# EAGLE board CT_schematic (EAGLE 7.6.0)

Size 100 x 80 mm. Coordinates in mm from the lower left corner, seen from the top.
Outline: 0,0 100,0 100,80 0,80 0,0
Copper layers (1*16): Top 0.035mm / dielectric 1.5mm / Bottom 0.035mm
Design rules "default": minimum track width 10mil, minimum drill 24mil, track to track 8mil, track to pad 8mil, pad to pad 8mil, via to via 8mil, smd to smd 8mil, copper to edge 40mil, drill to drill 8mil, minimum pad ring 10mil, minimum via ring 8mil, stop-mask expansion 4mil, vias tented up to drill 0mil, thermal gap 10mil

## Footprints (pad centres in the part's own frame; a part is rotated, then mirrored left to right if it is on the bottom)
C0603 = smd 0.8 x 0.8: 1 -0.762,0; 2 0.762,0
C0402 = smd 0.5 x 0.5: 1 -0.508,0; 2 0.508,0
C0805 = smd 1.2 x 1.3: 1 -1.016,0; 2 1.016,0
C1210 = smd 1.2 x 2.5: 1 -1.524,0; 2 1.524,0
EXV-9H = smd 3.505 x 1.676: 1 -2.857,0; 2 2.857,0
L0603 = smd 0.8 x 0.8: 1 -0.762,0; 2 0.762,0
PJ-037B_PACKAGE = drill 3.7 square: 1 12,0 | drill 3.2 square: 2 6,0
R0603 = smd 0.8 x 0.8: 1 -0.762,0; 2 0.762,0
UFQFPN48 = smd 0.559 x 0.305: 1 -3.375,2.751; 2 -3.375,2.251; 3 -3.375,1.75; 4 -3.375,1.25; 5 -3.375,0.75; 6 -3.375,0.25; 7 -3.375,-0.25; 8 -3.375,-0.75; 9 -3.375,-1.25; 10 -3.375,-1.75; 11 -3.375,-2.251; 12 -3.375,-2.751; 25 3.375,-2.751; 26 3.375,-2.251; 27 3.375,-1.75; 28 3.375,-1.25; 29 3.375,-0.75; 30 3.375,-0.25; 31 3.375,0.25; 32 3.375,0.75; 33 3.375,1.25; 34 3.375,1.75; 35 3.375,2.251; 36 3.375,2.751 | smd 0.305 x 0.559: 13 -2.751,-3.375; 14 -2.251,-3.375; 15 -1.75,-3.375; 16 -1.25,-3.375; 17 -0.75,-3.375; 18 -0.25,-3.375; 19 0.25,-3.375; 20 0.75,-3.375; 21 1.25,-3.375; 22 1.75,-3.375; 23 2.251,-3.375; 24 2.751,-3.375; 37 2.751,3.375; 38 2.251,3.375; 39 1.75,3.375; 40 1.25,3.375; 41 0.75,3.375; 42 0.25,3.375; 43 -0.25,3.375; 44 -0.75,3.375; 45 -1.25,3.375; 46 -1.75,3.375; 47 -2.251,3.375; 48 -2.751,3.375 | smd 5.588 x 5.588: 49 0,0
SSOP-28 = smd 1.5 x 0.4: 1 -3.625,4.225; 2 -3.625,3.575; 3 -3.625,2.925; 4 -3.625,2.275; 5 -3.625,1.625; 6 -3.625,0.975; 7 -3.625,0.325; 8 -3.625,-0.325; 9 -3.625,-0.975; 10 -3.625,-1.625; 11 -3.625,-2.275; 12 -3.625,-2.925; 13 -3.625,-3.575; 14 -3.625,-4.225; 15 3.625,-4.225; 16 3.625,-3.575; 17 3.625,-2.925; 18 3.625,-2.275; 19 3.625,-1.625; 20 3.625,-0.975; 21 3.625,-0.325; 22 3.625,0.325; 23 3.625,0.975; 24 3.625,1.625; 25 3.625,2.275; 26 3.625,2.925; 27 3.625,3.575; 28 3.625,4.225
FCI_10118193-0001LF = smd 0.4 x 1.35: 1 -1.3,2.675; 2 -0.65,2.675; 3 0,2.675; 4 0.65,2.675; 5 1.3,2.675 | smd 1.6 x 1.4: 6 -3.2,2.45; 7 3.2,2.45 | smd 1.9 x 1.9: 8 -1.2,0; 9 1.2,0 | hole 0.5: -3.3,0; 3.3,0
SAMTEC_FTSH-105-01-L-DV-K = smd 0.762 x 2.794: 1 -2.54,-2.032; 2 -2.54,2.032; 3 -1.27,-2.032; 4 -1.27,2.032; 5 0,-2.032; 6 0,2.032; 7 1.27,-2.032; 8 1.27,2.032; 9 2.54,-2.032; 10 2.54,2.032
SOT143B = smd 1 x 0.7: 1 -0.75,-1 | smd 0.6 x 0.7: 2 0.95,-1; 3 0.95,1; 4 -0.95,1
ABS07-32.768KHZ-7-T = smd 1.1 x 2.4: 1 -2.5,0; 2 0,0
ABLS-25.000MHZ-B2F-T = smd 5.6 x 2.8: 1 -3.81,0; 2 5.69,0
ABLS-12.000MHZ-B4-T = smd 5.6 x 2.8: 1 0,0; 2 9.5,0
WSON-8 = smd 0.3 x 0.6: 1 -0.75,0; 2 0.05,0; 3 0.85,0; 4 1.65,0; 5 1.65,3.8; 6 0.85,3.8; 7 0.05,3.8; 8 -0.75,3.8 | smd 3 x 2.6: PAD 0.45,1.9
SON-6 = smd 0.55 x 0.3: 1 -0.355,0.5 | smd 0.52 x 0.3: 2 -0.37,0; 3 -0.37,-0.5; 4 0.37,-0.5; 5 0.37,0; 6 0.37,0.5
SW_4-1437565-2 = smd 1.4 x 2.1: 1 -2.23,4.55; 2 -2.23,-4.55; 3 2.23,4.55; 4 2.23,-4.55
LGM67K-G1J2-24-Z = smd 0.8 x 1.4: A -2,0; C 0,0
NC7SZ125M5X = smd 1.3 x 0.7: 1 -1.3,0.95; 2 -1.3,0; 3 -1.3,-0.95; 4 1.3,-0.95; 5 1.3,0.95

## Placement (x,y rotation side)
C1  1e-06  [C0603]  -31.75,62.23 0 top  (outside the outline)
C2  1e-07  [C0603]  -35.56,62.23 0 top  (outside the outline)
C3  1e-07  [C0603]  -39.37,62.23 0 top  (outside the outline)
C4  1e-07  [C0603]  -43.18,62.23 0 top  (outside the outline)
C5  1e-07  [C0603]  -46.99,62.23 0 top  (outside the outline)
C6  1e-07  [C0603]  -50.8,62.23 0 top  (outside the outline)
C7  4.7e-06  [C0603]  -24.13,62.23 0 top  (outside the outline)
C8  2.2e-06  [C0603]  -27.94,62.23 0 top  (outside the outline)
C9  1e-08  [C0603]  -54.61,62.23 0 top  (outside the outline)
C10  1e-06  [C0603]  -58.42,62.23 0 top  (outside the outline)
C11  1e-11  [C0402]  -45.72,67.31 0 top  (outside the outline)
C12  1e-11  [C0402]  -49.53,67.31 0 top  (outside the outline)
C13  1e-11  [C0402]  -53.34,67.31 0 top  (outside the outline)
C14  1e-11  [C0402]  -57.15,67.31 0 top  (outside the outline)
C15  1e-06  [C0603]  -62.23,62.23 0 top  (outside the outline)
C16  1e-07  [C0402]  -60.96,67.31 0 top  (outside the outline)
C17  4.7e-06  [C0805]  -15.24,57.15 0 top  (outside the outline)
C18  1e-07  [C0402]  -64.77,67.31 0 top  (outside the outline)
C19  1e-07  [C0402]  -68.58,67.31 0 top  (outside the outline)
C20  1e-07  [C0402]  -15.24,72.39 0 top  (outside the outline)
C21  1e-08  [C0402]  -19.05,72.39 0 top  (outside the outline)
C22  1e-05  [C1210]  -48.26,49.53 0 top  (outside the outline)
C23  1e-05  [C1210]  -54.61,49.53 0 top  (outside the outline)
C24  1e-07  [C0402]  -22.86,72.39 0 top  (outside the outline)
C25  0.0001  [EXV-9H]  -49.53,34.29 0 top  (outside the outline)
C26  0.0001  [EXV-9H]  -60.96,34.29 0 top  (outside the outline)
C27  1e-08  [C0402]  -26.67,72.39 0 top  (outside the outline)
C28  1e-08  [C0402]  -30.48,72.39 0 top  (outside the outline)
F1  240.0  [L0603]  -66.04,62.23 0 top  (outside the outline)
J1  PJ-037B  [PJ-037B_PACKAGE]  -27.94,22.86 0 top  (outside the outline)
R1  10000.0  [R0603]  -35.56,57.15 0 top  (outside the outline)
R2  1000.0  [R0603]  -15.24,67.31 0 top  (outside the outline)
R3  1600.5  [R0603]  -19.05,67.31 0 top  (outside the outline)
R4  4700.0  [R0603]  -22.86,67.31 0 top  (outside the outline)
R5  10000.0  [R0603]  -40.64,57.15 0 top  (outside the outline)
R6  4700.0  [R0603]  -26.67,67.31 0 top  (outside the outline)
R7  10000.0  [R0603]  -45.72,57.15 0 top  (outside the outline)
R8  10000.0  [R0603]  -50.8,57.15 0 top  (outside the outline)
R9  10000.0  [R0603]  -55.88,57.15 0 top  (outside the outline)
R10  10000.0  [R0603]  -60.96,57.15 0 top  (outside the outline)
R11  10000.0  [R0603]  -66.04,57.15 0 top  (outside the outline)
R12  5.0  [R0603]  -30.48,67.31 0 top  (outside the outline)
R13  100000.0  [R0603]  -20.32,57.15 0 top  (outside the outline)
R14  2231.0  [R0603]  -34.29,67.31 0 top  (outside the outline)
R15  1000.0  [R0603]  -38.1,67.31 0 top  (outside the outline)
R16  10000.0  [R0603]  -15.24,62.23 0 top  (outside the outline)
R17  10000.0  [R0603]  -20.32,62.23 0 top  (outside the outline)
R18  9100.0  [R0603]  -41.91,67.31 0 top  (outside the outline)
R19  680000.0  [R0603]  -25.4,57.15 0 top  (outside the outline)
R20  120000.0  [R0603]  -30.48,57.15 0 top  (outside the outline)
U1  STM32F411CCU6  [UFQFPN48]  -17.78,34.29 0 top  (outside the outline)
U2  FT232RL-REEL  [SSOP-28]  -20.32,7.62 0 top  (outside the outline)
U3  10118193-0001LF  [FCI_10118193-0001LF]  -29.21,33.02 0 top  (outside the outline)
U4  FTSH-105-01-L-DV-K  [SAMTEC_FTSH-105-01-L-DV-K]  -49.53,7.62 0 top  (outside the outline)
U5  10118193-0001LF  [FCI_10118193-0001LF]  -39.37,33.02 0 top  (outside the outline)
U6  prtr5v0u2ax  [SOT143B]  -43.18,72.39 0 top  (outside the outline)
U7  ABS07-32.768KHZ-7-T  [ABS07-32.768KHZ-7-T]  -27.94,50.8 0 top  (outside the outline)
U8  ABLS-25.000MHZ-B2F-T  [ABLS-25.000MHZ-B2F-T]  -26.67,43.18 0 top  (outside the outline)
U9  ABLS-12.000MHZ-B4-T  [ABLS-12.000MHZ-B4-T]  -50.8,43.18 0 top  (outside the outline)
U10  LP3878SDX-ADJ/NOPB  [WSON-8]  -66.04,17.78 0 top  (outside the outline)
U11  TPS3895ADRYR  [SON-6]  -46.99,71.12 0 top  (outside the outline)
U12  4-1437565-2  [SW_4-1437565-2]  -44.45,21.59 0 top  (outside the outline)
U13  Q65110A2395  [LGM67K-G1J2-24-Z]  -36.83,50.8 0 top  (outside the outline)
U14  nc7sz125m5x  [NC7SZ125M5X]  -59.69,49.53 0 top  (outside the outline)
U15  nc7sz125m5x  [NC7SZ125M5X]  -66.04,49.53 0 top  (outside the outline)

## Library data of the parts
C1-C28 F1 J1 R1-R20 U1-U15 = circuit_tree

## Nets
CLK_CRYSTAL_U1_3: C11.1 U1.3 U7.1
CLK_CRYSTAL_U1_4: C12.1 U1.4 U7.2
CLK_CRYSTAL_U1_5: C13.1 U1.5 U8.1
CLK_CRYSTAL_U1_6: C14.1 U1.6 U8.2
CLK_CRYSTAL_U2_27: U2.27 U9.1
CLK_CRYSTAL_U2_28: U2.28 U9.2
GND: C1.2 C2.2 C3.2 C4.2 C5.2 C6.2 C7.2 C8.2 C9.2 C10.2 C11.2 C12.2 C13.2 C14.2 C15.2 C16.2 C17.2 C18.2 C19.2 C20.2 C21.2 C22.2 C23.2 C24.2 C25.2 C26.2 C27.2 C28.2 J1.2 R2.2 R5.2 R8.2 R12.2 R15.2 R18.2 R20.2 U1.8 U1.23 U1.35 U1.47 U1.49 U2.7 U2.18 U2.21 U2.25 U2.26 U3.5 U3.6 U3.7 U3.8 U3.9 U4.3 U4.5 U5.5 U5.6 U5.7 U5.8 U5.9 U6.1 U10.3 U10.PAD U11.2 U13.C U14.2 U14.3 U15.1 U15.3
NET_U1_7: R4.1 U1.7 U15.4
NET_U1_9: C9.1 C10.1 F1.1 U1.9
NET_U1_22: C8.1 U1.22
NET_U1_44: R5.1 U1.44
NET_U1_45: R3.1 U1.45 U13.A
NET_U1_46: R1.1 U1.46 U12.3 U12.4
NET_U2_14: R7.1 U2.14
NET_U2_17: C18.1 U2.17
NET_U2_19: R8.1 U2.19
NET_U3_1: R6.1 U3.1
NET_U3_2: U2.16 U3.2
NET_U3_3: U2.15 U3.3
NET_U3_19: R6.2
NET_U4_9: R12.1 U4.9
NET_U10_1: C21.1 U10.1
NET_U10_6: R14.2 R15.1 U10.6
NET_U10_8: R13.1 U10.8
NET_U11_1: R17.1 R18.1 U11.1
NET_U11_3: R19.2 R20.1 U11.3
NET_U11_4: R16.1 U11.4 U14.4 U15.2
NET_U12_1: R2.1 U12.1 U12.2
PROC_SYS_JTCK_SWCLK: R10.1 U1.37 U4.4
PROC_SYS_JTDO_SWO: U1.39 U4.6
PROC_SYS_JTMS_SWDIO: R11.1 U1.34 U4.2
PROC_USART2_CTS: U1.10 U2.3
PROC_USART2_RTS: U1.11 U2.11
PROC_USART2_RX: U1.13 U2.1
PROC_USART2_TX: U1.12 U2.5
PROC_USB_OTG_FS_DM: U1.32 U5.2 U6.3
PROC_USB_OTG_FS_DP: U1.33 U5.3 U6.2
PROC_USB_OTG_FS_VBUS: C15.1 U1.30 U5.1 U6.4
RST_OUT_U4_JTAG_RST_B: R9.1 U4.10 U14.1
VCC_S1_13V7: C22.1 C25.1 C26.1 J1.1 R13.2 U10.4
VCC_TIER1_3V3: C1.1 C2.1 C3.1 C4.1 C5.1 C6.1 C7.1 C16.1 C17.1 C19.1 C20.1 C23.1 C24.1 C27.1 C28.1 F1.2 R1.2 R3.2 R4.2 R7.2 R9.2 R10.2 R11.2 R14.1 R16.2 R17.2 R19.1 U1.1 U1.24 U1.36 U1.48 U2.4 U2.20 U4.1 U10.5 U11.6 U14.5 U15.5

## Tracks (layer width: path | path; a pad name or v marks a point on that pad's centre or on a via)
CLK_CRYSTAL_U1_3  (2 unrouted)
CLK_CRYSTAL_U1_4  (2 unrouted)
CLK_CRYSTAL_U1_5  (2 unrouted)
CLK_CRYSTAL_U1_6  (2 unrouted)
CLK_CRYSTAL_U2_27  (1 unrouted)
CLK_CRYSTAL_U2_28  (1 unrouted)
GND  (66 unrouted)
NET_U1_7  (2 unrouted)
NET_U1_9  (3 unrouted)
NET_U1_22  (1 unrouted)
NET_U1_44  (1 unrouted)
NET_U1_45  (2 unrouted)
NET_U1_46  (3 unrouted)
NET_U2_14  (1 unrouted)
NET_U2_17  (1 unrouted)
NET_U2_19  (1 unrouted)
NET_U3_1  (1 unrouted)
NET_U3_2  (1 unrouted)
NET_U3_3  (1 unrouted)
NET_U4_9  (1 unrouted)
NET_U10_1  (1 unrouted)
NET_U10_6  (2 unrouted)
NET_U10_8  (1 unrouted)
NET_U11_1  (2 unrouted)
NET_U11_3  (2 unrouted)
NET_U11_4  (3 unrouted)
NET_U12_1  (2 unrouted)
PROC_SYS_JTCK_SWCLK  (2 unrouted)
PROC_SYS_JTDO_SWO  (1 unrouted)
PROC_SYS_JTMS_SWDIO  (2 unrouted)
PROC_USART2_CTS  (1 unrouted)
PROC_USART2_RTS  (1 unrouted)
PROC_USART2_RX  (1 unrouted)
PROC_USART2_TX  (1 unrouted)
PROC_USB_OTG_FS_DM  (2 unrouted)
PROC_USB_OTG_FS_DP  (2 unrouted)
PROC_USB_OTG_FS_VBUS  (3 unrouted)
RST_OUT_U4_JTAG_RST_B  (2 unrouted)
VCC_S1_13V7  (5 unrouted)
VCC_TIER1_3V3  (37 unrouted)